# Altium PCB VME3U - 160x100mm - RTM (Rear Card).PcbDoc
Units mm, origin at the board's own origin, x right, y up, seen from the top; angles counter-clockwise.
Board outline 160 x 100 mm, 4 copper layers (Top Layer, L2_GND, L2_PWR, Bottom Layer), stack 1.58 mm thick; 13 components, 1 nets, 170 pads, 36 vias.
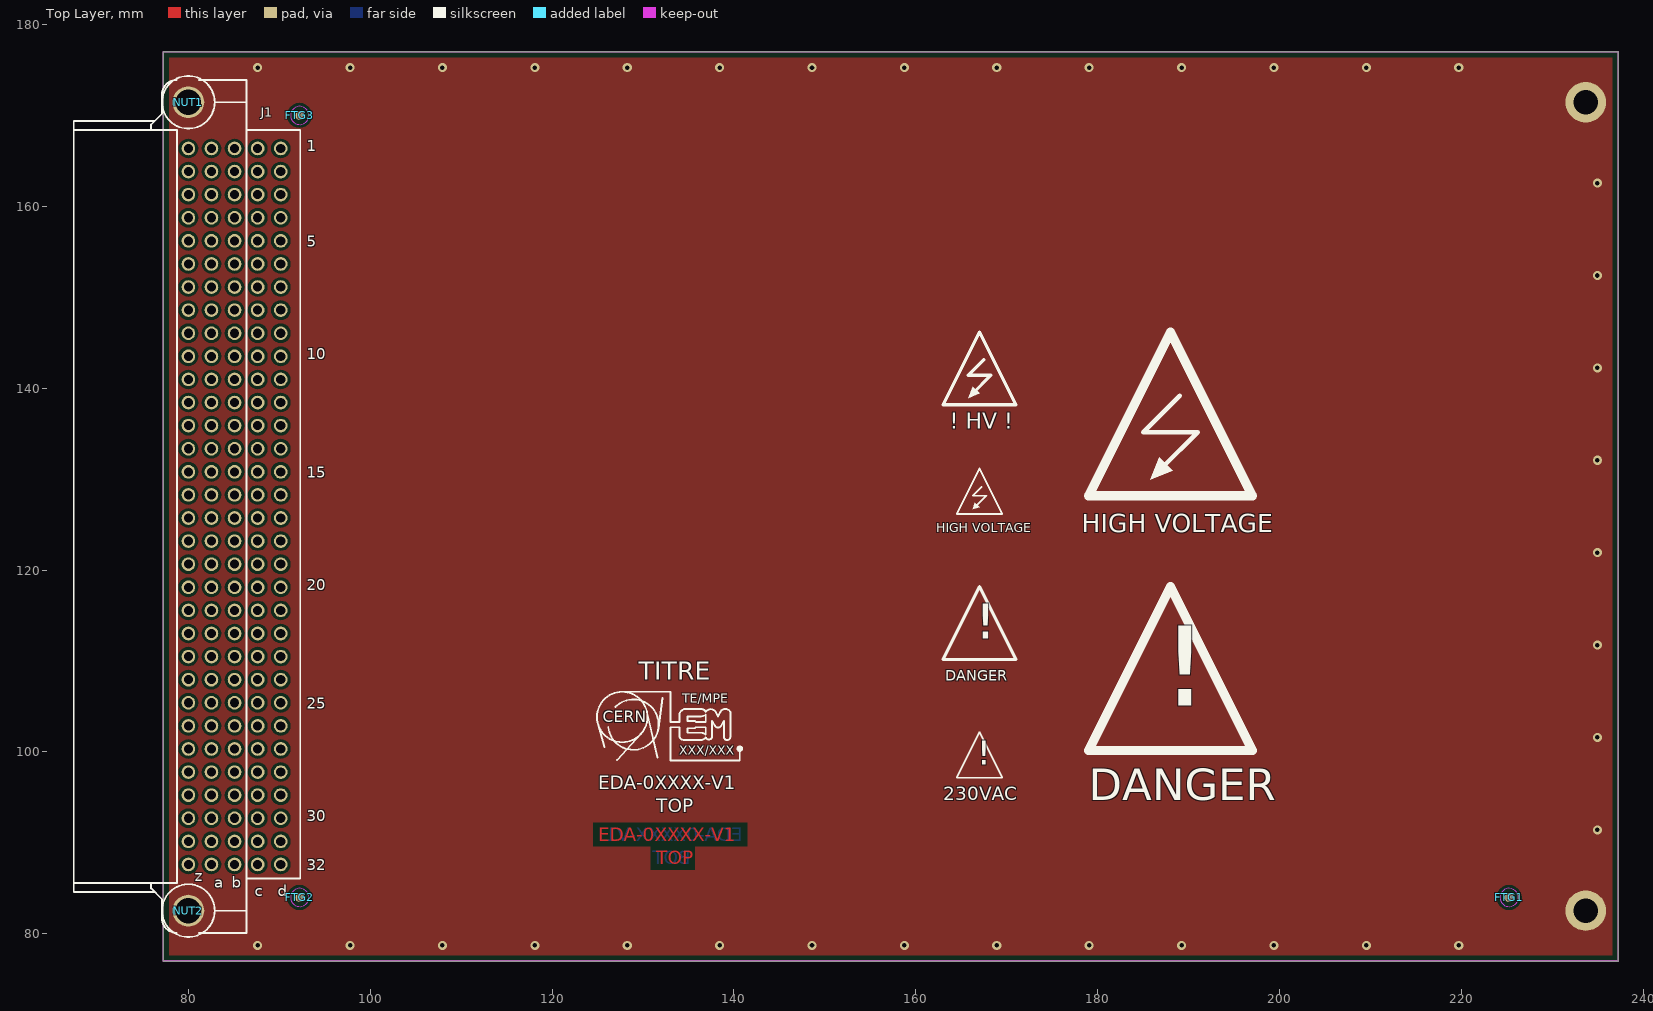
[diagram p0: Top Layer view]
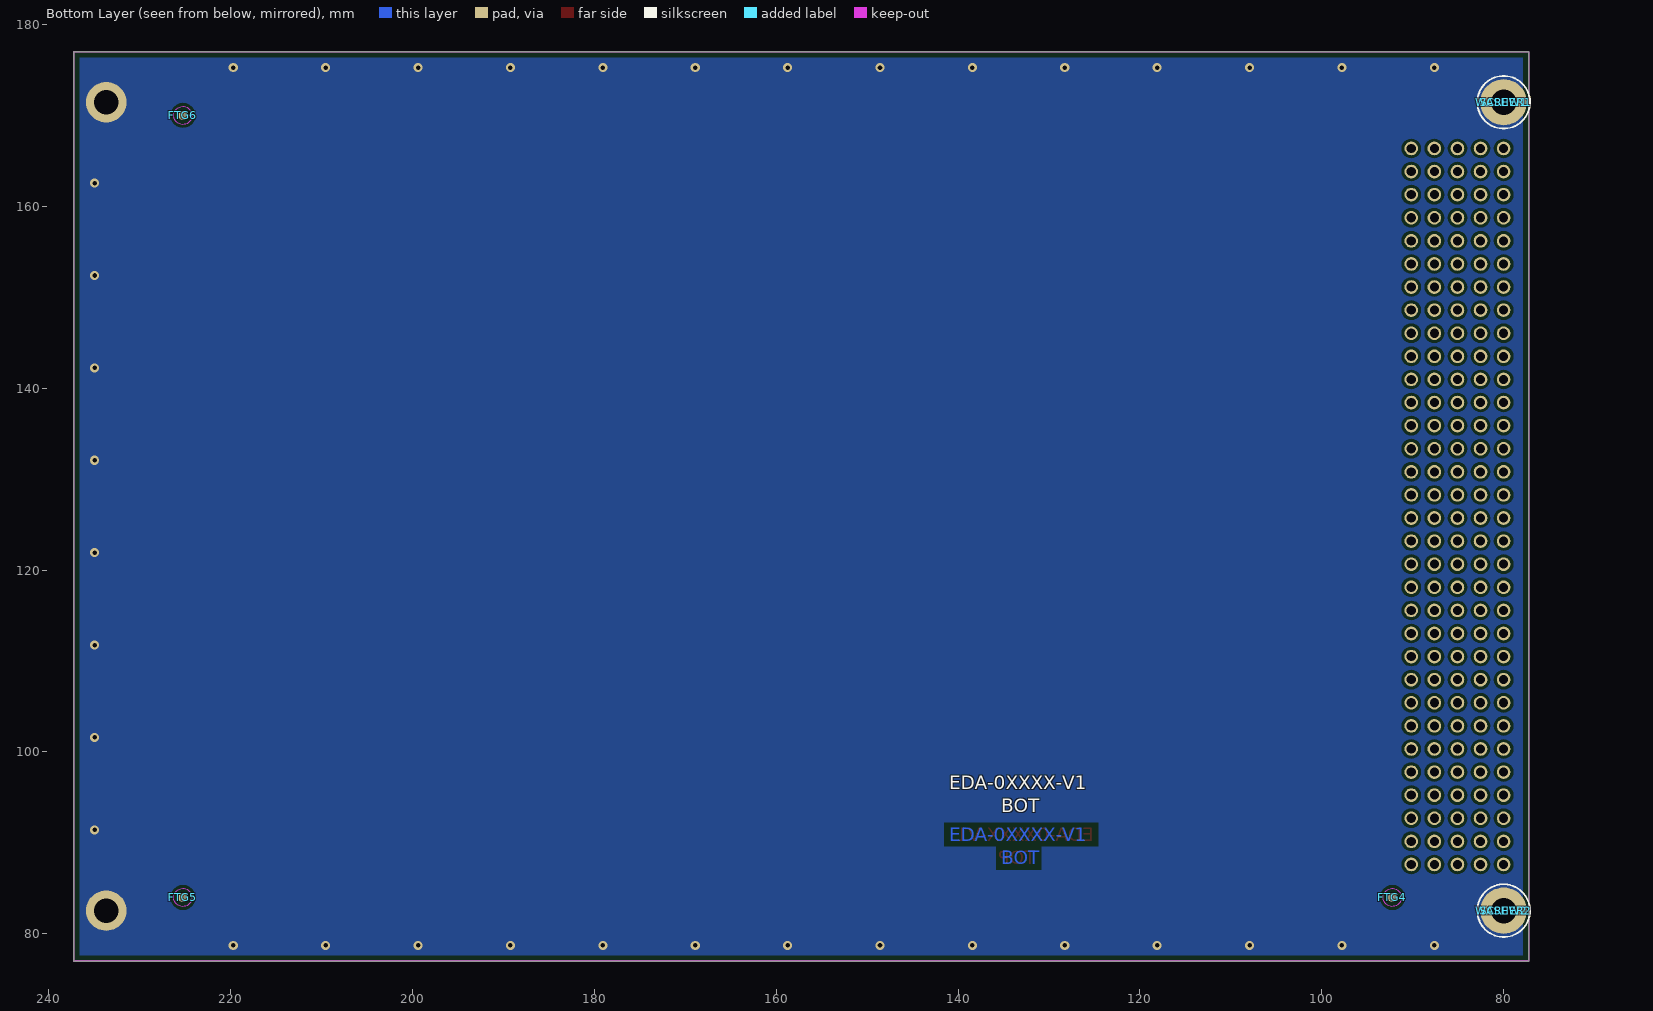
[diagram p1: Bottom Layer view, seen from below]
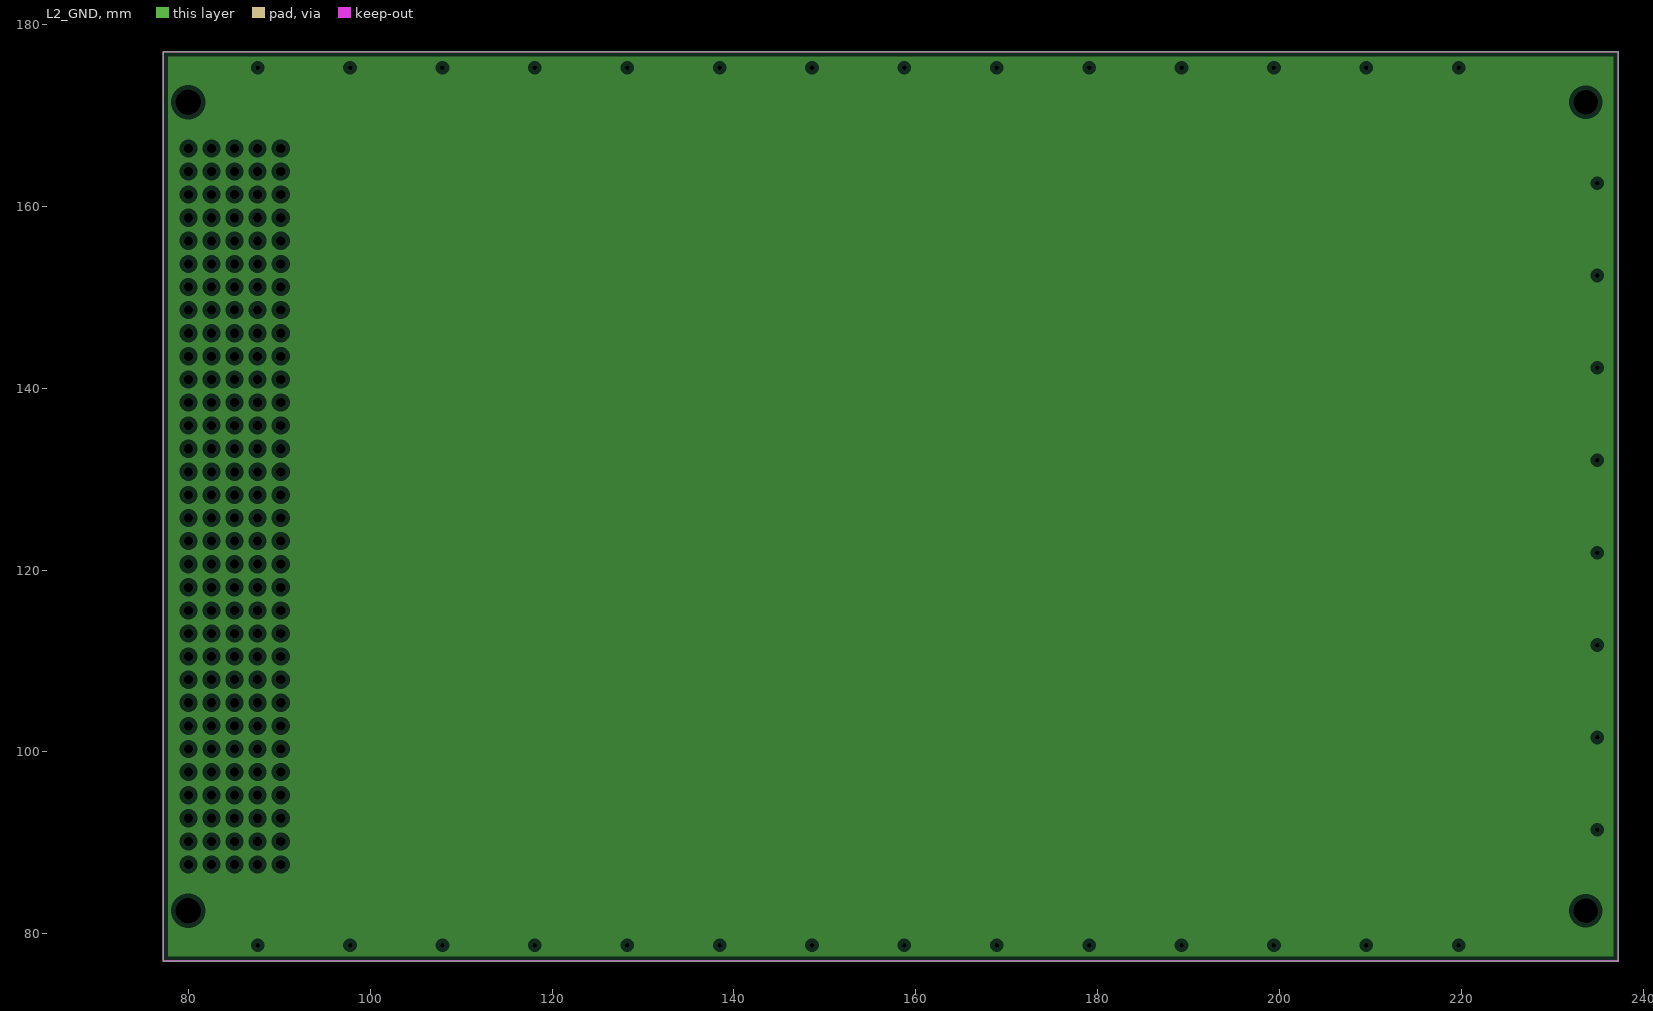
[diagram p2: L2_GND, clearances drawn from the general rule]
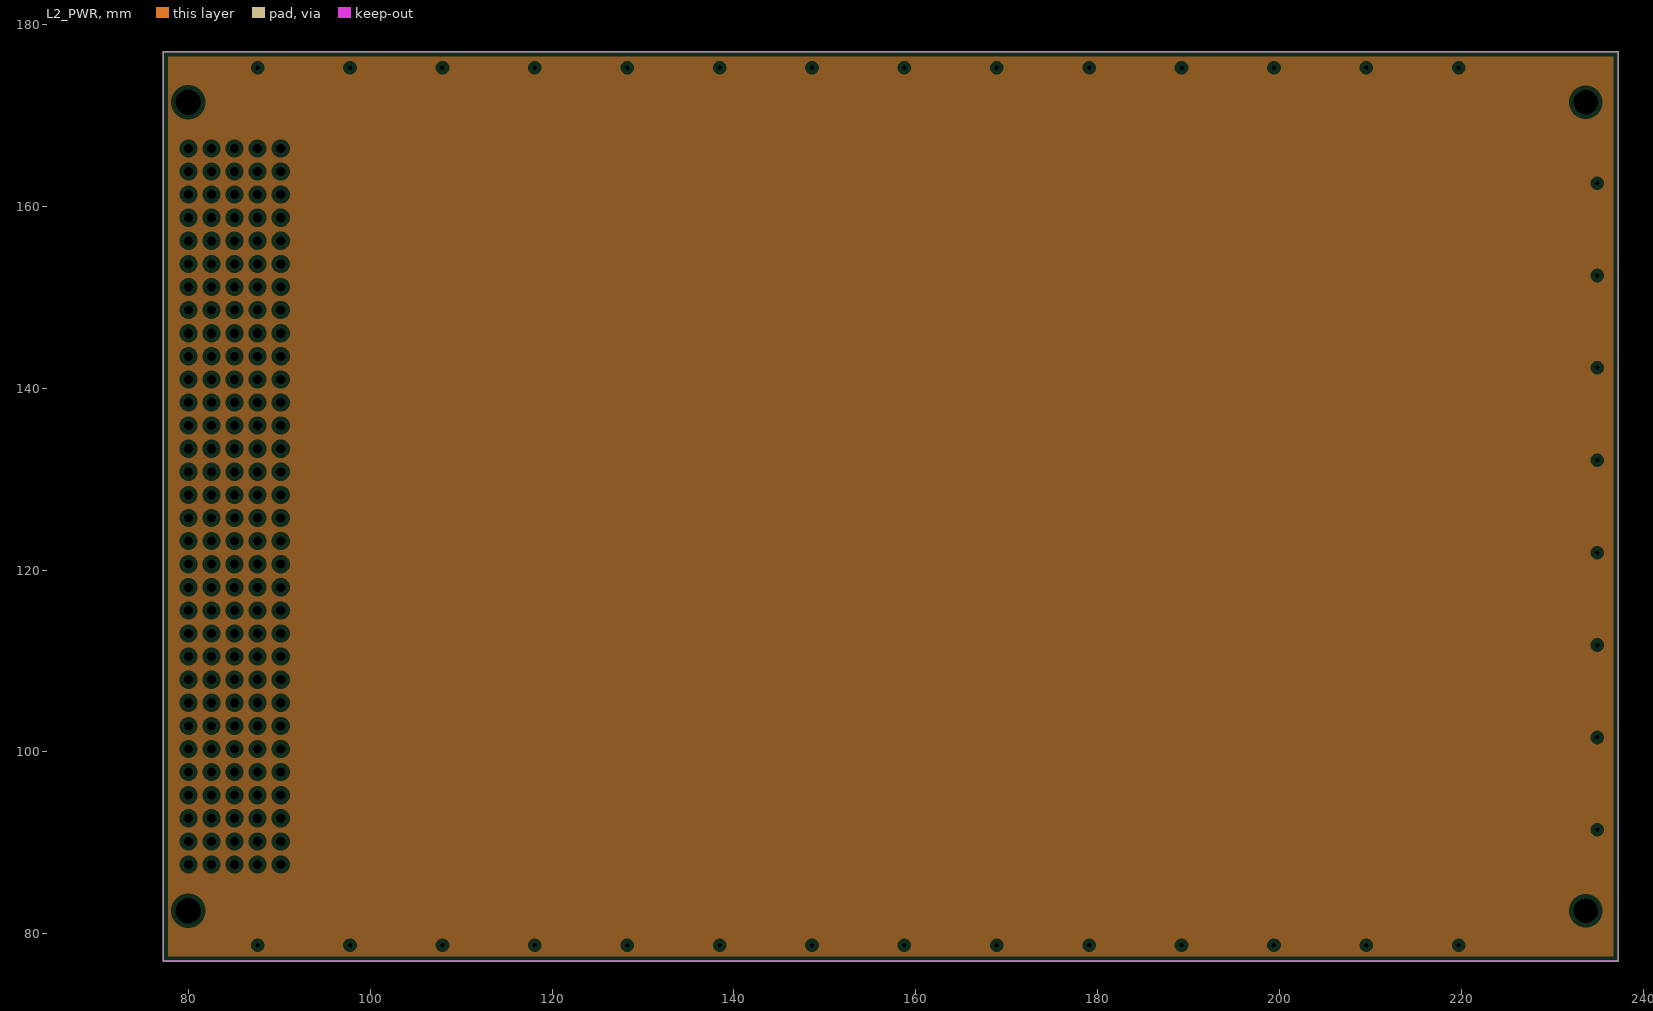
[diagram p3: L2_PWR, clearances drawn from the general rule]

## Layer stack, top to bottom
Top Solder: solder mask 0.01, Solder Resist, Dk 3.5
Top Layer: signal copper 0.035
Dielectric1: prepreg 0.22, FR-4, Dk 4.7
L2_GND: plane copper 0.035
Dielectric2: core 1, FR-4, Dk 4.7
L2_PWR: plane copper 0.035
Dielectric3: prepreg 0.22, FR-4, Dk 4.7
Bottom Layer: signal copper 0.035
Bottom Solder: solder mask 0.01, Solder Resist, Dk 3.5

## Board outline
77.25,77 237.25,77 237.25,177 77.25,177

## Design rules (kind name [scope] priority, off if disabled: settings)
Clearance Clearance_KeepOut [OnLayer('Keep-Out Layer') vs (InPadClass('DIN'))] p1: gap=0.1 ignorepadtopadclearanceinfootprint=FALSE
Clearance Clearance_Mires [OnLayer('Keep-Out Layer') vs HasFootprint('FIDUCIAL_TOP_S200-400') or HasFootprint('FIDUCIAL_TOP_C100-200') or HasFootprint('FIDUCIAL_TOP_S100-200')] p2: gap=0 ignorepadtopadclearanceinfootprint=FALSE except(4.9: Arc-SMDPad Track-SMDPad)
Clearance [All] p3: gap=0.31 ignorepadtopadclearanceinfootprint=FALSE
ComponentClearance ComponentClearance_Overlapping [InComponentClass('Overlapping') or InComponentClass('NotMounted') vs InComponentClass('Overlapping')] p1: gap=0 collisioncheckmode=3 verticalgap=0 showdistances=FALSE
ComponentClearance [not InComponentClass('Overlapping')] p2: gap=0.2 collisioncheckmode=3 verticalgap=0.2 showdistances=FALSE
DiffPairsRouting [All] p1: maxlimit=0.457 minlimit=0.457 mostfreqgap=0.457 toplayer_minwidth=0.229 toplayer_maxwidth=0.229 toplayer_prefwidth=0.229 bottomlayer_minwidth=0.229 bottomlayer_maxwidth=0.229 bottomlayer_prefwidth=0.229 maxuncoupledlength=2.54
FabricationTestPointUsage TestPointUsage [All] p1: valid=0 allowmultiple=FALSE
FabricationTestpoint Testpoint [All] p1: side=3 testpointundercomponent=TRUE minsize=1.016 maxsize=2.54 preferedsize=1.524 minholesize=0 maxholesize=1.016 preferedholesize=0.813 testpointgrid=0.025 allowsidetop=TRUE allowsidebottom=TRUE usegrid=TRUE gridtolerance=0
Height [All] p1: minheight=0 maxheight=25 prefheight=10
HoleSize [All] p1: absolutevalues=TRUE maxlimit=5 minlimit=0.5 maxpercent=80.000 minpercent=20.000
HoleToHoleClearance [All] p1: gap=0.2 allowstackedmicrovias=TRUE
MinimumAnnularRing MinimumAnnularRing_Via [IsVia] p1: minimumring=0.25
MinimumAnnularRing [All] p2: minimumring=0.35
MinimumSolderMaskSliver [All] p1: minsoldermaskwidth=0.35
PermittedLayers [All] p1: toplayerpermitted=TRUE bottomlayerpermitted=TRUE
PlaneClearance [All] p1: clearance=0.5
PlaneConnect PlaneConnect_Direct [InPadClass('Mounting') or IsVia] p1: planeconnectstyle=Direct reliefexpansion=0.508 reliefentries=4 reliefconductorwidth=0.254 reliefairgap=0.254
PlaneConnect "PlaneConnect_0 > 0.5" [AsMM(HoleDiameter)<0.5] p2: planeconnectstyle=Relief reliefexpansion=0.3 reliefentries=4 reliefconductorwidth=0.2 reliefairgap=0.2
PlaneConnect "PlaneConnect_0.5 > 1" [(AsMM(HoleDiameter)>=0.5) and (AsMM(HoleDiameter)<1)] p3: planeconnectstyle=Relief reliefexpansion=0.3 reliefentries=4 reliefconductorwidth=0.25 reliefairgap=0.2
PlaneConnect "PlaneConnect_1 > 1.5" [(AsMM(HoleDiameter)>=1) and (AsMM(HoleDiameter)<1.5)] p4: planeconnectstyle=Relief reliefexpansion=0.3 reliefentries=4 reliefconductorwidth=0.3 reliefairgap=0.2
PlaneConnect "PlaneConnect_1.5 > 2" [(AsMM(HoleDiameter)>=1.5) and (AsMM(HoleDiameter)<2)] p5: planeconnectstyle=Relief reliefexpansion=0.3 reliefentries=4 reliefconductorwidth=0.4 reliefairgap=0.2
PlaneConnect [All] p6: planeconnectstyle=Relief reliefexpansion=0.3 reliefentries=4 reliefconductorwidth=0.5 reliefairgap=0.2
PolygonConnect PolygonConnect_Direct [InPadClass('Mounting') or IsVia] p1: connectstyle=Direct reliefconductorwidth=0.254 reliefentries=4 polygonreliefangle="90 Angle" airgapwidth=0.254
PolygonConnect "PolygonConnect_0 > 0.5" [AsMM(HoleDiameter)<0.5] p2: connectstyle=Relief reliefconductorwidth=0.2 reliefentries=4 polygonreliefangle="90 Angle" airgapwidth=0.2
PolygonConnect "PolygonConnect_0.5 > 1" [(AsMM(HoleDiameter)>=0.5) and (AsMM(HoleDiameter)<1)] p3: connectstyle=Relief reliefconductorwidth=0.25 reliefentries=4 polygonreliefangle="90 Angle" airgapwidth=0.2
PolygonConnect "PolygonConnect_1 > 1.5" [(AsMM(HoleDiameter)>=1) and (AsMM(HoleDiameter)<1.5)] p4: connectstyle=Relief reliefconductorwidth=0.3 reliefentries=4 polygonreliefangle="90 Angle" airgapwidth=0.2
PolygonConnect "PolygonConnect_1.5 > 2" [(AsMM(HoleDiameter)>=1.5) and (AsMM(HoleDiameter)<2)] p5: connectstyle=Relief reliefconductorwidth=0.4 reliefentries=4 polygonreliefangle="90 Angle" airgapwidth=0.2
PolygonConnect [All] p6: connectstyle=Relief reliefconductorwidth=0.5 reliefentries=4 polygonreliefangle="90 Angle" airgapwidth=0.2
RoomDefinition EDA-0xxxx-Vx-x_sch [InComponentClass('EDA-0xxxx-Vx-x_sch')] p1: confinementstyle=ConfineIn formatcopy=TRUE lockcomponents=FALSE outline 76.44,77 246.38,77 246.38,177 76.44,177
RoutingVias RoutingVias_NoNet [Not IsElectrical] p1: holewidth=0 width=0 viastyle="Through Hole" minholewidth=0 minwidth=0 maxholewidth=0 maxwidth=0
RoutingVias [All] p2: holewidth=0.5 width=1 viastyle="Through Hole" minholewidth=0.5 minwidth=1 maxholewidth=0.5 maxwidth=1
SilkToSilkClearance [All] p1: silktosilkclearance=0.2
SilkToSolderMaskClearance SilkToSolderMaskClearanceVias [IsVia vs IsText] p1: minsilkscreentomaskgap=0 clearancetoexposedcopper=TRUE
SilkToSolderMaskClearance SilkscreenOverComponentPads [IsPad] p2: minsilkscreentomaskgap=0.225 clearancetoexposedcopper=TRUE
SolderMaskExpansion [All] p1: expansion=0
ViasUnderSMD [All] p1: allowed=FALSE
Width [All] p1: maxlimit=2.54 minlimit=0.305 preferedwidth=0.305
18 further rules are at their usual default settings.

## Classes and differential pairs
pad class Mounting: Free-P1 Free-P2 J1-MTG1 J1-MTG2
pad class DIN: J1-MTG1 J1-MTG2
component class Overlapping: J1 NUT1 NUT2 SCREW1 SCREW2 WASHER1 WASHER2
component class NotMounted: FTG1 FTG2 FTG3 FTG4 FTG5 FTG6

## Components (designator, comment, footprint, x,y, rotation, side; value= is the part's Value field where it differs from the comment)
FTG1 "Comment" FIDUCIAL_TOP_C100-200 225.25,84 r180 top
FTG2 "Comment" FIDUCIAL_TOP_C100-200 92.25,84 r180 top
FTG3 "Comment" FIDUCIAL_TOP_C100-200 92.25,170 r180 top
FTG4 "Comment" FIDUCIAL_TOP_C100-200 92.25,84 r0 bottom
FTG5 "Comment" FIDUCIAL_TOP_C100-200 225.25,84 r0 bottom
FTG6 "Comment" FIDUCIAL_TOP_C100-200 225.25,170 r0 bottom
J1 "HAR-BUS 64" "HARTING_02 04 160 1101" 80.01,87.63 r180 top
NUT1 "M2.5" BOSSARD_BN628-1241427_v 80.01,171.45 r0 top (schematic designator NUT2)
NUT2 "M2.5" BOSSARD_BN628-1241427_v 80.01,82.55 r0 top (schematic designator NUT1)
SCREW1 "M2.5x10" BOSSARD_BN5687-3061600_v 80.01,171.45 r90 bottom (schematic designator SCREW2)
SCREW2 "M2.5x10" BOSSARD_BN5687-3061600_v 80.01,82.55 r90 bottom (schematic designator SCREW1)
WASHER1 "D5xd2.7" BOSSARD_BN678-8303525_v 80.01,171.45 r90 bottom (schematic designator WASHER2)
WASHER2 "D5xd2.7" BOSSARD_BN678-8303525_v 80.01,82.55 r90 bottom (schematic designator WASHER1)

## Footprints (in the part's own frame and the unit in brackets; to place one, negate y for a bottom-side part, rotate by r counter-clockwise, add the part's x,y. Pads: shape width x height; smd on the part's side, far side on the other; paste and mask are expansions set on the pad)
BOSSARD_BN628-1241427_v [mm] "M2.5 Hexagon Nut ~0,8d, ISO 4032 - DIN 934, Stainless Steel A2"
  silkscreen extent -2.9,-2.9 2.9,2.9, body extent -2.89,-2.5 2.89,2.5, height 8
BOSSARD_BN678-8303525_v [mm] "Waved Spring Washer for M2.5 Screw - Stainless Steel - A2 / 1.4310"
  silkscreen extent -2.9,-2.9 2.9,2.9, body extent -2.5,-2.5 2.5,2.5, height 0.3
BOSSARD_BN5687-3061600_v [mm] "M2.5 L=10mm Hexalobular Socket Pan Head Screw, Fully Threaded - Stainless Steel A2"
  silkscreen extent -2.9,-2.9 2.9,2.9, body extent -2.5,-2.5 2.5,2.5, height 2.4
FIDUCIAL_TOP_C100-200 [mm] "Round Fiducial Target, Top Layer, 1.0mm, Top Solder 2.0mm, Keepout =2.0mm"
  round 1 smd paste-0.51 mask+0.5: FTG2(0,0)
  Top Layer keep-out circle w0.1: c0,0 r1
"HARTING_02 04 160 1101" [mm] "PCB connector, DIN 41612, har-bus 64, 160 poles, Angled solder pins, 3.0 mm, Male contacts, Four first mating contacts, Performance level 2 as per IEC 60603-2, Row pitch: 2.54 mm, Without fixing"
  round 1.5 hole 1: a1(-2.54,-78.74) a2(-2.54,-76.2) a3(-2.54,-73.66) a4(-2.54,-71.12) a5(-2.54,-68.58) a6(-2.54,-66.04) a7(-2.54,-63.5) a8(-2.54,-60.96) a9(-2.54,-58.42) a10(-2.54,-55.88) a11(-2.54,-53.34) a12(-2.54,-50.8) a13(-2.54,-48.26) a14(-2.54,-45.72) a15(-2.54,-43.18) a16(-2.54,-40.64) a17(-2.54,-38.1) a18(-2.54,-35.56) a19(-2.54,-33.02) a20(-2.54,-30.48) a21(-2.54,-27.94) a22(-2.54,-25.4) a23(-2.54,-22.86) a24(-2.54,-20.32) a25(-2.54,-17.78) a26(-2.54,-15.24) a27(-2.54,-12.7) a28(-2.54,-10.16) a29(-2.54,-7.62) a30(-2.54,-5.08) a31(-2.54,-2.54) a32(-2.54,0) b1(-5.08,-78.74) b2(-5.08,-76.2) b3(-5.08,-73.66) b4(-5.08,-71.12) b5(-5.08,-68.58) b6(-5.08,-66.04) b7(-5.08,-63.5) b8(-5.08,-60.96) b9(-5.08,-58.42) b10(-5.08,-55.88) b11(-5.08,-53.34) b12(-5.08,-50.8) b13(-5.08,-48.26) b14(-5.08,-45.72) b15(-5.08,-43.18) b16(-5.08,-40.64) b17(-5.08,-38.1) b18(-5.08,-35.56) b19(-5.08,-33.02) b20(-5.08,-30.48) b21(-5.08,-27.94) b22(-5.08,-25.4) b23(-5.08,-22.86) b24(-5.08,-20.32) b25(-5.08,-17.78) b26(-5.08,-15.24) b27(-5.08,-12.7) b28(-5.08,-10.16) b29(-5.08,-7.62) b30(-5.08,-5.08) b31(-5.08,-2.54) b32(-5.08,0) c1(-7.62,-78.74) c2(-7.62,-76.2) c3(-7.62,-73.66) c4(-7.62,-71.12) c5(-7.62,-68.58) c6(-7.62,-66.04) c7(-7.62,-63.5) c8(-7.62,-60.96) c9(-7.62,-58.42) c10(-7.62,-55.88) c11(-7.62,-53.34) c12(-7.62,-50.8) c13(-7.62,-48.26) c14(-7.62,-45.72) c15(-7.62,-43.18) c16(-7.62,-40.64) c17(-7.62,-38.1) c18(-7.62,-35.56) c19(-7.62,-33.02) c20(-7.62,-30.48) c21(-7.62,-27.94) c22(-7.62,-25.4) c23(-7.62,-22.86) c24(-7.62,-20.32) c25(-7.62,-17.78) c26(-7.62,-15.24) c27(-7.62,-12.7) c28(-7.62,-10.16) c29(-7.62,-7.62) c30(-7.62,-5.08) c31(-7.62,-2.54) c32(-7.62,0) d1(-10.16,-78.74) d2(-10.16,-76.2) d3(-10.16,-73.66) d4(-10.16,-71.12) d5(-10.16,-68.58) d6(-10.16,-66.04) d7(-10.16,-63.5) d8(-10.16,-60.96) d9(-10.16,-58.42) d10(-10.16,-55.88) d11(-10.16,-53.34) d12(-10.16,-50.8) d13(-10.16,-48.26) d14(-10.16,-45.72) d15(-10.16,-43.18) d16(-10.16,-40.64) d17(-10.16,-38.1) d18(-10.16,-35.56) d19(-10.16,-33.02) d20(-10.16,-30.48) d21(-10.16,-27.94) d22(-10.16,-25.4) d23(-10.16,-22.86) d24(-10.16,-20.32) d25(-10.16,-17.78) d26(-10.16,-15.24) d27(-10.16,-12.7) d28(-10.16,-10.16) d29(-10.16,-7.62) d30(-10.16,-5.08) d31(-10.16,-2.54) d32(-10.16,0) z1(0,-78.74) z2(0,-76.2) z3(0,-73.66) z4(0,-71.12) z5(0,-68.58) z6(0,-66.04) z7(0,-63.5) z8(0,-60.96) z9(0,-58.42) z10(0,-55.88) z11(0,-53.34) z12(0,-50.8) z13(0,-48.26) z14(0,-45.72) z15(0,-43.18) z16(0,-40.64) z17(0,-38.1) z18(0,-35.56) z19(0,-33.02) z20(0,-30.48) z21(0,-27.94) z22(0,-25.4) z23(0,-22.86) z24(0,-20.32) z25(0,-17.78) z26(0,-15.24) z27(0,-12.7) z28(0,-10.16) z29(0,-7.62) z30(0,-5.08) z31(0,-2.54) z32(0,0)
  round 3.5 / inner round 3.5 / far side round 5.1 hole 2.8: MTG1(0,5.08) MTG2(0,-83.82)
  silkscreen extent -12.3,-86.27 12.6,7.53, body extent -12.3,-86.27 12.6,7.53, height 10.65

## Part data
FTG1 FTG2 FTG3 FTG4 FTG5 FTG6: library part MMBD4148
J1: library part "HARTING_02 04 160 1101", "Connector 160zabcd Female (5x32)", Manufacturer=HARTING, Manufacturer Part Number="02 04 160 1101", Author="CERN DEM JLC", ClassName=Overlapping, ComponentHeight=10.7mm, Component Type=Standard, CreateDate=03/11/2010, Family="HAR-BUS 64", HelpURL="\\cern.ch\dfs\Applications\Altium\Datasheets\HARTING_02 04 160 1101.pdf", LatestRevisionDate=03/11/2010, Mounted=Yes, Part Description="DIN 41612, har-bus 64, 160 poles, 5 Rows z+a+b+c+d, Angled solder pins, Female contacts, Pitch 2.54mm, Performance level 1", Part Number="HARTING_02 04 160 1101", Pin Count=162, PressFit=No, Sense=No, SMD=No, Socket=No, Status=None
NUT1 NUT2: library part BOSSARD_BN628-1241427_v, "Nut", Manufacturer=BOSSARD, Manufacturer Part Number="BN628 Art.1241427", Author="CERN DEM JMW", ClassName=Overlapping, ComponentHeight=2mm, Component Type=Mechanical, CreateDate=04/12/2015, HelpURL=\\cern.ch\dfs\Applications\Altium\Datasheets\BOSSARD_BN628-1241427.pdf, LatestRevisionDate=04/12/2015, Mounted=Yes, PackageDescription="M2.5 Hexagon Nut ~0,8d, ISO 4032 - DIN 934, Stainless Steel A2", Part Description="M2.5 Hexagon Nut ~0,8d, ISO 4032 - DIN 934, Stainless Steel A2", Part Number=BOSSARD_BN628-1241427_v, Pin Count=0, PressFit=No, Sense=No, SMD=No, Socket=No, Status=None
SCREW1 SCREW2: library part BOSSARD_BN5687-3061600_v, "Screw", Manufacturer=BOSSARD, Manufacturer Part Number="BN5687 Art.3061600", Author="CERN DEM JLC", ClassName=Overlapping, ComponentHeight=2.1mm, Component Type=Mechanical, CreateDate=22/10/2012, HelpURL=\\cern.ch\dfs\Applications\Altium\Datasheets\BOSSARD_BN5687-3061600.pdf, LatestRevisionDate=22/10/2012, Mounted=Yes, PackageDescription="M2.5 L=10mm Hexalobular Socket Pan Head Screw, Fully Threaded - Stainless Steel A2", Part Description="M2.5 L=10mm Hexalobular Socket Pan Head Screw, Fully Threaded, Stainless Steel A2", Part Number=BOSSARD_BN5687-3061600_v, Pin Count=1, PressFit=No, Sense=No, SMD=No, Socket=No, Status=None, Table="Fasteners & Fixings"
WASHER1 WASHER2: library part BOSSARD_BN678-8303525_v, "Washer", Manufacturer=BOSSARD, Manufacturer Part Number="BN678 Art.8303525", Author="CERN DEM JLC", ClassName=Overlapping, ComponentHeight=0.3mm, Component Type=Mechanical, CreateDate=22/10/2012, HelpURL=\\cern.ch\dfs\Applications\Altium\Datasheets\BOSSARD_BN678-8303525.pdf, LatestRevisionDate=22/10/2012, Mounted=Yes, PackageDescription="Waved Spring Washer for M2.5 Screw, Stainless Steel A2 / 1.4310", Part Description="Waved Spring Washer for M2.5 Screw, Stainless Steel A2 / 1.4310", Part Number=BOSSARD_BN678-8303525_v, Pin Count=1, PressFit=No, Sense=No, SMD=No, Socket=No, Status=None, Table="Fasteners & Fixings"

## Free pads (board coordinates)
  round 4.45 hole 2.7: P1(233.68,171.45) P2(233.68,82.55)

## Via types
v1: diameter 1, hole 0.5, Top Layer to Bottom Layer, tented both sides, 36 vias

## Nets (pads, with @x,y where several pads share a name; then routed paths per layer and width w, separated by ;. In a path a pad name is that pad's centre, name@x,y a point inside that pad or via, vN(x,y) a via of type N, cw(c..) or ccw(c..) an arc to the next point about the centre after c; other vN are vias at no path point)
GND: J1.MTG1 J1.MTG2 pad.P1 pad.P2
  other v1: 87.63,78.74 97.79,78.74 107.95,78.74 118.11,78.74 128.27,78.74 138.43,78.74 148.59,78.74 158.75,78.74 168.91,78.74 179.07,78.74 189.23,78.74 199.39,78.74 209.55,78.74 219.71,78.74 234.95,91.44 234.95,101.6 234.95,111.76 234.95,121.92 234.95,132.08 234.95,142.24 234.95,152.4 234.95,162.56 87.63,175.26 97.79,175.26 107.95,175.26 118.11,175.26 128.27,175.26 138.43,175.26 148.59,175.26 158.75,175.26 168.91,175.26 179.07,175.26 189.23,175.26 199.39,175.26 209.55,175.26 219.71,175.26
pads on no net: FTG1.FTG2 FTG2.FTG2 FTG3.FTG2 FTG4.FTG2 FTG5.FTG2 FTG6.FTG2 J1.a1 J1.a2 J1.a3 J1.a4 J1.a5 J1.a6 J1.a7 J1.a8 J1.a9 J1.a10 J1.a11 J1.a12 J1.a13 J1.a14 J1.a15 J1.a16 J1.a17 J1.a18 J1.a19 J1.a20 J1.a21 J1.a22 J1.a23 J1.a24 J1.a25 J1.a26 J1.a27 J1.a28 J1.a29 J1.a30 J1.a31 J1.a32 J1.b1 J1.b2 J1.b3 J1.b4 J1.b5 J1.b6 J1.b7 J1.b8 J1.b9 J1.b10 J1.b11 J1.b12 J1.b13 J1.b14 J1.b15 J1.b16 J1.b17 J1.b18 J1.b19 J1.b20 J1.b21 J1.b22 J1.b23 J1.b24 J1.b25 J1.b26 J1.b27 J1.b28 J1.b29 J1.b30 J1.b31 J1.b32 J1.c1 J1.c2 J1.c3 J1.c4 J1.c5 J1.c6 J1.c7 J1.c8 J1.c9 J1.c10 J1.c11 J1.c12 J1.c13 J1.c14 J1.c15 J1.c16 J1.c17 J1.c18 J1.c19 J1.c20 J1.c21 J1.c22 J1.c23 J1.c24 J1.c25 J1.c26 J1.c27 J1.c28 J1.c29 J1.c30 J1.c31 J1.c32 J1.d1 J1.d2 J1.d3 J1.d4 J1.d5 J1.d6 J1.d7 J1.d8 J1.d9 J1.d10 J1.d11 J1.d12 J1.d13 J1.d14 J1.d15 J1.d16 J1.d17 J1.d18 J1.d19 J1.d20 J1.d21 J1.d22 J1.d23 J1.d24 J1.d25 J1.d26 J1.d27 J1.d28 J1.d29 J1.d30 J1.d31 J1.d32 J1.z1 J1.z2 J1.z3 J1.z4 J1.z5 J1.z6 J1.z7 J1.z8 J1.z9 J1.z10 J1.z11 J1.z12 J1.z13 J1.z14 J1.z15 J1.z16 J1.z17 J1.z18 J1.z19 J1.z20 J1.z21 J1.z22 J1.z23 J1.z24 J1.z25 J1.z26 J1.z27 J1.z28 J1.z29 J1.z30 J1.z31 J1.z32

## Polygon pours and split planes (outlines as drawn)
GND on Top Layer "GND_L01_P000" (solid, remove dead copper, pour order 0): 236.615,77.635 236.615,176.365 77.885,176.365 77.885,77.635
GND on Bottom Layer "GND_L04_P002" (solid, remove dead copper, pour order 2): 236.615,77.635 236.615,176.365 77.885,176.365 77.885,77.635
no net on L2_GND (split plane): 236.748,77.502 77.752,77.502 77.752,176.498 236.748,176.498
no net on L2_PWR (split plane): 236.748,77.502 77.752,77.502 77.752,176.498 236.748,176.498

## Keep-outs
Keep-Out Layer:
  lines w0.2: 77.25,77 77.25,81.182 77.25,83.918 77.25,170.082 77.25,172.818 77.25,177 237.25,177 237.25,77 77.25,77

## Other copper
Top Layer:
  text "EDA-0XXXX-V1" at 125.095,90.17 h1.5
  text "TOP" at 131.445,87.63 h1.5
  text ".Layer_Name" at 156.845,57.15 h1.91 r45
  text "1" at 155.892,52.07 h2.54
Bottom Layer:
  text "EDA-0XXXX-V1" at 140.97,90.17 h1.5
  text "BOT" at 135.255,87.63 h1.5
  text ".Layer_Name" at 184.15,69.215 h1.91 r45
  text "4" at 170.498,52.07 h2.54
L2_GND (plane layer: these items are gaps in the copper):
  rectangle: 163.83,50.8 173.99,55.88
  rectangle: 153.67,50.8 158.75,55.88
  text ".Layer_Name" at 161.925,57.15 h1.91 r45
  text "2" at 160.655,52.07 h2.54
L2_PWR (plane layer: these items are gaps in the copper):
  rectangle: 168.91,50.8 173.99,55.88
  rectangle: 153.67,50.8 163.83,55.88
  text ".Layer_Name" at 173.99,64.135 h1.91 r45
  text "3" at 165.417,52.07 h2.54

## Silkscreen, mask and mechanical layers (free items; w line width, h text height)
Top Overlay:
  circle w0.203: c127.72,103.845 r2.775
  circle w0.3: c140.653,100.36 r0.2
  region: 185.765,129.925 186.765,132.425 188.265,130.925
  region: 165.765,138.925 166.265,140.175 167.015,139.425
  region: 166.265,126.675 166.515,127.425 167.015,126.925
  lines w0.2: 134.01,101.715 134.01,102.715 ; 134.01,103.315 134.01,104.215 ; 166.765,127.175 167.765,128.175 166.265,128.175 167.265,129.175 ; 164.515,97.175 167.015,102.175 169.515,97.175 164.515,97.175 ; 164.515,126.175 169.515,126.175 167.015,131.175 164.515,126.175
  lines w0.203: 125.047,103.099 125.765,100.527 ; 126.19,102.743 ccw(c128.95,103.012) 126.968,104.951 ; 127.166,99.12 129.77,101.976 ; 127.719,106.62 133.032,106.62 133.032,103.315 134.01,103.315 ; 130.421,104.476 131.615,99.365 ; 131.696,102.62 132.168,105.933 ; 133.032,102.715 133.032,99.06 140.653,99.06 140.653,100.36 ; 133.046,102.715 134.01,102.715 ; 134.01,101.715 ccw(c134.51,101.827) 134.51,101.315 136.41,101.315 ccw(c136.343,101.994) 136.91,101.615 ; 134.01,104.215 cw(c134.843,103.882) 134.51,104.715 136.41,104.715 cw(c136.41,104.148) 136.91,104.415 cw(c137.46,104.048) 138.01,104.415 ; 136.411,102.115 cw(c136.391,101.341) 136.911,101.915 ; 136.41,102.115 134.91,102.115 134.91,102.615 135.61,102.615 ccw(c135.644,102.798) 135.81,102.715 136.91,102.715 136.91,101.915 ; 136.91,101.615 ccw(c137.252,101.723) 137.61,101.715 137.61,103.415 137.91,102.915 ccw(c138.26,103.055) 138.61,102.915 138.91,103.415 138.91,101.715 ; 138.01,104.415 138.26,103.915 138.51,104.415 ; 138.51,104.415 cw(c139.06,104.108) 139.61,104.415 ; 138.91,101.715 ccw(c139.26,101.665) 139.61,101.715 ; 139.61,101.715 139.61,104.415 ; 134.91,103.415 135.61,103.415 cw(c135.644,103.232) 135.81,103.315 136.91,103.315 136.91,104.115 cw(c136.41,104.64) 136.41,103.915 134.91,103.915 134.91,103.415
  lines w0.35: 166.265,139.425 168.265,141.425 165.765,141.425 167.515,143.175 ; 163.015,110.175 167.015,118.175 171.015,110.175 163.015,110.175 ; 163.015,138.175 171.015,138.175 167.015,146.175 163.015,138.175
  lines w0.5: 187.015,131.175 191.015,135.175 185.015,135.175 189.015,139.175
  lines w1: 179.015,100.175 188.015,118.175 197.015,100.175 179.015,100.175 ; 179.015,128.175 188.015,146.175 197.015,128.175 179.015,128.175
  text "! HV !" at 163.765,134.925 h3
  text "HIGH VOLTAGE" at 162.265,124.175 h1
  text "HIGH VOLTAGE" at 178.265,124.175 h2
  text "!" at 166.515,111.075 h7.5
  text "TITRE" at 129.54,107.95 h2
  text "DANGER" at 163.265,107.425 h2
  text "TE/MPE" at 134.302,105.41 h1
  text "CERN" at 125.603,103.251 h1.25
  text "!" at 186.715,101.675 h18
  text "XXX/XXX" at 133.985,99.695 h1
  text "!" at 166.715,97.675 h5
  text "EDA-0XXXX-V1" at 125.095,95.885 h1.5
  text "230VAC" at 163.015,94.675 h1.5
  text "DANGER" at 179.015,94.675 h3.5
  text "TOP" at 131.445,93.345 h1.5
  text ".Layer_Name" at 187.96,66.04 h1.91
Bottom Overlay:
  text "EDA-0XXXX-V1" at 140.97,95.885 h1.5
  text "BOT" at 135.255,93.345 h1.5
  text ".Layer_Name" at 228.6,66.04 h1.91
Top Paste:
  text ".Layer_Name" at 187.96,60.96 h1.91
Bottom Paste:
  text ".Layer_Name" at 228.6,60.96 h1.91
Top Solder:
  region: 237.25,168.55 237.25,177 229.79,177 229.79,168.55
  region: 237.25,77 237.25,85.45 229.79,85.45 229.79,77
  text ".Layer_Name" at 187.96,63.5 h1.91
Bottom Solder:
  text ".Layer_Name" at 228.6,63.5 h1.91
Mechanical 1:
  the board outline again, w1.27
Mechanical 2:
  text "Components" at 238.76,66.04 h1.91
  text ".Component_Count" at 256.54,66.04 h1.91
  text "Pins" at 238.76,63.5 h1.91
  text ".Pad_Count" at 256.54,63.5 h1.91
  text "Vias" at 238.76,60.96 h1.91
  text ".Via_Count" at 256.54,60.96 h1.91
  text "Holes" at 238.76,58.42 h1.91
  text ".Hole_Count" at 256.54,58.42 h1.91
  text "Nets" at 238.76,55.88 h1.91
  text ".Net_Count" at 256.54,55.88 h1.91
Mechanical 3:
  circle w0.127: c233.68,82.55 r2.25
  circle w0.127: c233.68,171.45 r2.25
  lines w0.127: 231.775,83.748 234.878,80.645 ; 231.775,172.648 234.878,169.545 ; 232.482,84.455 235.585,81.352 ; 232.482,173.355 235.585,170.252 ; 237.25,74.45 237.25,85.45 ; 237.25,168.55 237.25,179.55 ; 239.79,64.75 233.09,64.75 232.09,65.75 233.09,66.75 239.79,66.75 ; 239.79,74.45 229.79,74.45 229.79,85.45 239.79,85.45 ; 239.79,187.25 233.09,187.25 232.09,188.25 233.09,189.25 239.79,189.25 ; 242.29,72.25 259.29,72.25 259.29,74.25 258.29,74.25 ; 242.29,82.65 248.071,82.65 ccw(c248.071,87.65) 250.784,83.45 256.2,86.95 259.29,86.95 259.29,84.95 258.29,84.95 ; 245.09,63.25 252.29,63.25 ; 245.09,63.75 252.29,63.75 ; 245.09,64.25 252.29,64.25 ; 245.09,64.75 252.29,64.75 ; 245.09,65.25 252.29,65.25 ; 245.09,65.75 252.29,65.75 ; 245.09,66.25 252.29,66.25 ; 245.09,66.75 252.29,66.75 ; 245.09,67.25 252.29,67.25 ; 245.09,67.75 252.29,67.75 ; 245.09,68.25 252.29,68.25 ; 245.09,185.75 252.29,185.75 ; 245.09,186.25 252.29,186.25 ; 245.09,186.75 252.29,186.75 ; 245.09,187.25 252.29,187.25 ; 245.09,187.75 252.29,187.75 ; 245.09,188.25 252.29,188.25 ; 245.09,188.75 252.29,188.75 ; 245.09,189.25 252.29,189.25 ; 245.09,189.75 252.29,189.75 ; 245.09,190.25 252.29,190.25 ; 245.09,190.75 252.29,190.75 ; 257.29,74.25 244.69,74.25 244.69,80.65 250.135,80.65 256.79,84.95 257.29,84.95 ; 245.09,62.75 252.29,62.75 ; 245.09,62.75 245.09,68.75 ; 245.09,62.75 242.29,62.75 242.29,68.75 245.09,68.75 ; 245.09,68.75 252.29,68.75 ; 245.09,185.25 252.29,185.25 ; 245.09,185.25 245.09,191.25 ; 245.09,185.25 242.29,185.25 242.29,191.25 245.09,191.25 ; 245.09,191.25 252.29,191.25 ; 252.29,62.75 252.29,68.75 ; 252.29,62.75 253.09,63.55 253.09,67.95 252.29,68.75 ; 252.29,185.25 252.29,191.25 ; 252.29,185.25 253.09,186.05 253.09,190.45 252.29,191.25 ; 229.79,168.55 229.79,179.55 239.79,179.55 239.79,168.55 229.79,168.55 ; 239.79,62.65 239.79,191.35 242.29,191.35 242.29,62.65 239.79,62.65 ; 244.69,75.2 244.69,79.7 245.79,79.7 cw(c245.79,79.2) 246.29,79.2 246.29,77.85 245.49,77.85 245.49,77.05 246.29,77.05 246.29,75.7 cw(c245.79,75.7) 245.79,75.2 244.69,75.2 ; 257.29,73.3 257.29,85.9 258.29,85.9 258.29,73.3 257.29,73.3
Corners:
  lines w0.254: 72.25,77 77.25,77 77.25,72 ; 72.25,177 77.25,177 77.25,182 ; 158.75,50.8 158.75,55.88 ; 163.83,50.8 163.83,55.88 ; 168.91,50.8 168.91,55.88 ; 237.25,72 237.25,77 242.25,77 ; 237.25,182 237.25,177 242.25,177 ; 153.67,50.8 153.67,55.88 173.99,55.88 173.99,50.8 153.67,50.8
Title Block:
  circle w0.305: c88.265,63.5 r3.81
  lines w0.254: 86.36,62.238 ccw(c90.805,62.23) 87.073,64.644 ; 95.25,62.23 95.25,66.675 ; 97.79,59.055 139.7,59.055 ; 97.79,62.23 139.7,62.23 ; 97.79,65.405 139.7,65.405 ; 111.76,55.88 111.76,68.58 ; 83.82,55.88 83.82,68.58 96.52,68.58 96.52,55.88 83.82,55.88 ; 97.79,55.88 97.79,68.58 139.7,68.58 139.7,55.88 97.79,55.88
  lines w0.305: 84.709,62.128 85.725,59.055 ; 87.757,56.007 90.83,60.681 ; 88.265,67.31 95.885,67.945 ; 91.999,64.262 94.615,55.88
  text "Number" at 99.06,66.04 h1.91
  text "EDA-0XXXX-V1" at 113.03,66.04 h1.91
  text "Drawn By" at 99.06,62.865 h1.91
  text "XXX" at 113.03,62.865 h1.91
  text "CERN" at 85.09,62.611 h2.54
  text "DATE" at 99.06,59.69 h1.91
  text "XX-XX-XXXX" at 113.03,59.69 h1.91
  text "MOD." at 99.06,56.515 h1.91
  text "-" at 113.03,56.515 h1.91
  text "Print Date" at 99.06,53.34 h1.27
  text ".Print_Date" at 114.3,53.34 h1.27
  text ".Print_Time" at 127,53.34 h1.27
  text ".Print_Scale" at 99.06,50.8 h1.27
  text "Altium Designer Rev" at 99.06,48.26 h1.27
  text "'.Application_BuildNumber'" at 118.11,48.26 h1.27
Notvisible:
  drawing of 207 lines, arcs and shapes, not listed
  text "z" at 79.725,167.29 h1
  text "a" at 82.283,167.272 h1
  text "c" at 87.277,167.29 h1
  text "b" at 84.823,167.158 h1
  text "d" at 89.867,167.158 h1
  text "1" at 92.96,165.87 h1
  text "GRID ORG" at 61.277,126.047 h2
  text "32" at 93.44,87.126 h1
Drill Drawing:
  circle w0.254: c80.532,202.777 r0.847
  lines w0.254: 79.685,196.003 81.378,196.003 80.532,194.31 79.685,196.003 ; 79.685,198.12 81.378,198.12 81.378,199.813 79.685,199.813 79.685,198.12 ; 79.685,206.163 80.108,206.163 80.532,205.74 80.955,206.163 81.378,206.163 80.955,206.587 81.378,207.01 80.955,207.01 80.532,207.433 80.108,207.01 79.685,207.01 80.108,206.587 79.685,206.163
  lines w0.381: 78.166,193.167 151.137,193.167 ; 78.166,208.407 151.137,208.407 ; 90.932,189.357 90.932,212.217 ; 103.543,189.357 103.543,212.217 ; 127.436,189.357 127.436,212.217 ; 137.518,189.357 137.518,212.217 ; 78.166,189.357 151.137,189.357 151.137,212.217 78.166,212.217 78.166,189.357
  text "Symbol" at 80.452,209.55 h1.83
  text "Count" at 92.075,209.55 h1.83
  text "Hole Size" at 104.686,209.55 h1.83
  text "Plated" at 128.579,209.55 h1.83
  text "Via/Pad" at 138.661,209.55 h1.83
  text "36" at 92.075,205.74 h1.52
  text "0.50mm (19.69mil)" at 104.686,205.74 h1.52
  text "PTH" at 128.579,205.74 h1.52
  text "Via" at 138.661,205.74 h1.52
  text "160" at 92.075,201.93 h1.52
  text "1.00mm (39.37mil)" at 104.686,201.93 h1.52
  text "PTH" at 128.579,201.93 h1.52
  text "Pad" at 138.661,201.93 h1.52
  text "2" at 92.075,198.12 h1.52
  text "2.70mm (106.30mil)" at 104.686,198.12 h1.52
  text "PTH" at 128.579,198.12 h1.52
  text "Pad" at 138.661,198.12 h1.52
  text "2" at 92.075,194.31 h1.52
  text "2.80mm (110.24mil)" at 104.686,194.31 h1.52
  text "PTH" at 128.579,194.31 h1.52
  text "Pad" at 138.661,194.31 h1.52
  text "200 Total" at 92.075,190.5 h1.52
  text "General tolerances +/-0.05mm unless otherwise stated" at 78.422,185.42 h1.5

## Dimensions
77.25,177 to 237.25,177 on Mechanical 2
237.25,77 to 237.25,177 on Mechanical 2
237.25,77 to 233.68,82.55 on Drill Drawing
237.25,77 to 233.68,82.55 on Drill Drawing

## Text inside footprints (layer, text, board x,y; h text height)
J1: Top Overlay "1" at 93.027,166.052 h1.2; Top Overlay "32" at 93.027,86.995 h1.2; Top Overlay "5" at 93.027,155.575 h1.2; Top Overlay "10" at 93.027,143.192 h1.2; Top Overlay "15" at 93.027,130.175 h1.2; Top Overlay "20" at 93.027,117.792 h1.2; Top Overlay "25" at 93.027,104.775 h1.2; Top Overlay "30" at 93.027,92.392 h1.2; Top Overlay "c" at 87.312,84.138 h1.2; Top Overlay "b" at 84.772,85.09 h1.2; Top Overlay "a" at 82.867,85.09 h1.2; Top Overlay "z" at 81.597,86.677 h1.2 r180; Top Overlay "d" at 89.852,84.138 h1.2; Notvisible "PCB" at 77.47,128.905 h1.5 r270; Mechanical 14 "1" at 93.51,166.945 h1.2 r180; Mechanical 14 "32" at 95.04,88.245 h1.2 r180; Mechanical 14 "5" at 93.965,156.825 h1.2 r180; Mechanical 14 "10" at 94.835,144.135 h1.2 r180; Mechanical 14 "15" at 94.835,131.435 h1.2 r180; Mechanical 14 "20" at 95.015,118.745 h1.2 r180; Mechanical 14 "25" at 95.065,106.02 h1.2 r180; Mechanical 14 "30" at 95.015,93.32 h1.2 r180; Mechanical 14 "d" at 90.805,85.368 h1.2 r180; Mechanical 14 "z" at 81.597,86.677 h1.2 r180; Mechanical 14 "a" at 82.931,86.313 h1.2 r180; Mechanical 14 "b" at 85.471,86.313 h1.2 r180; Mechanical 14 "c" at 88.138,85.368 h1.2 r180